# EAGLE board Conductivity (EAGLE 9.5.0)
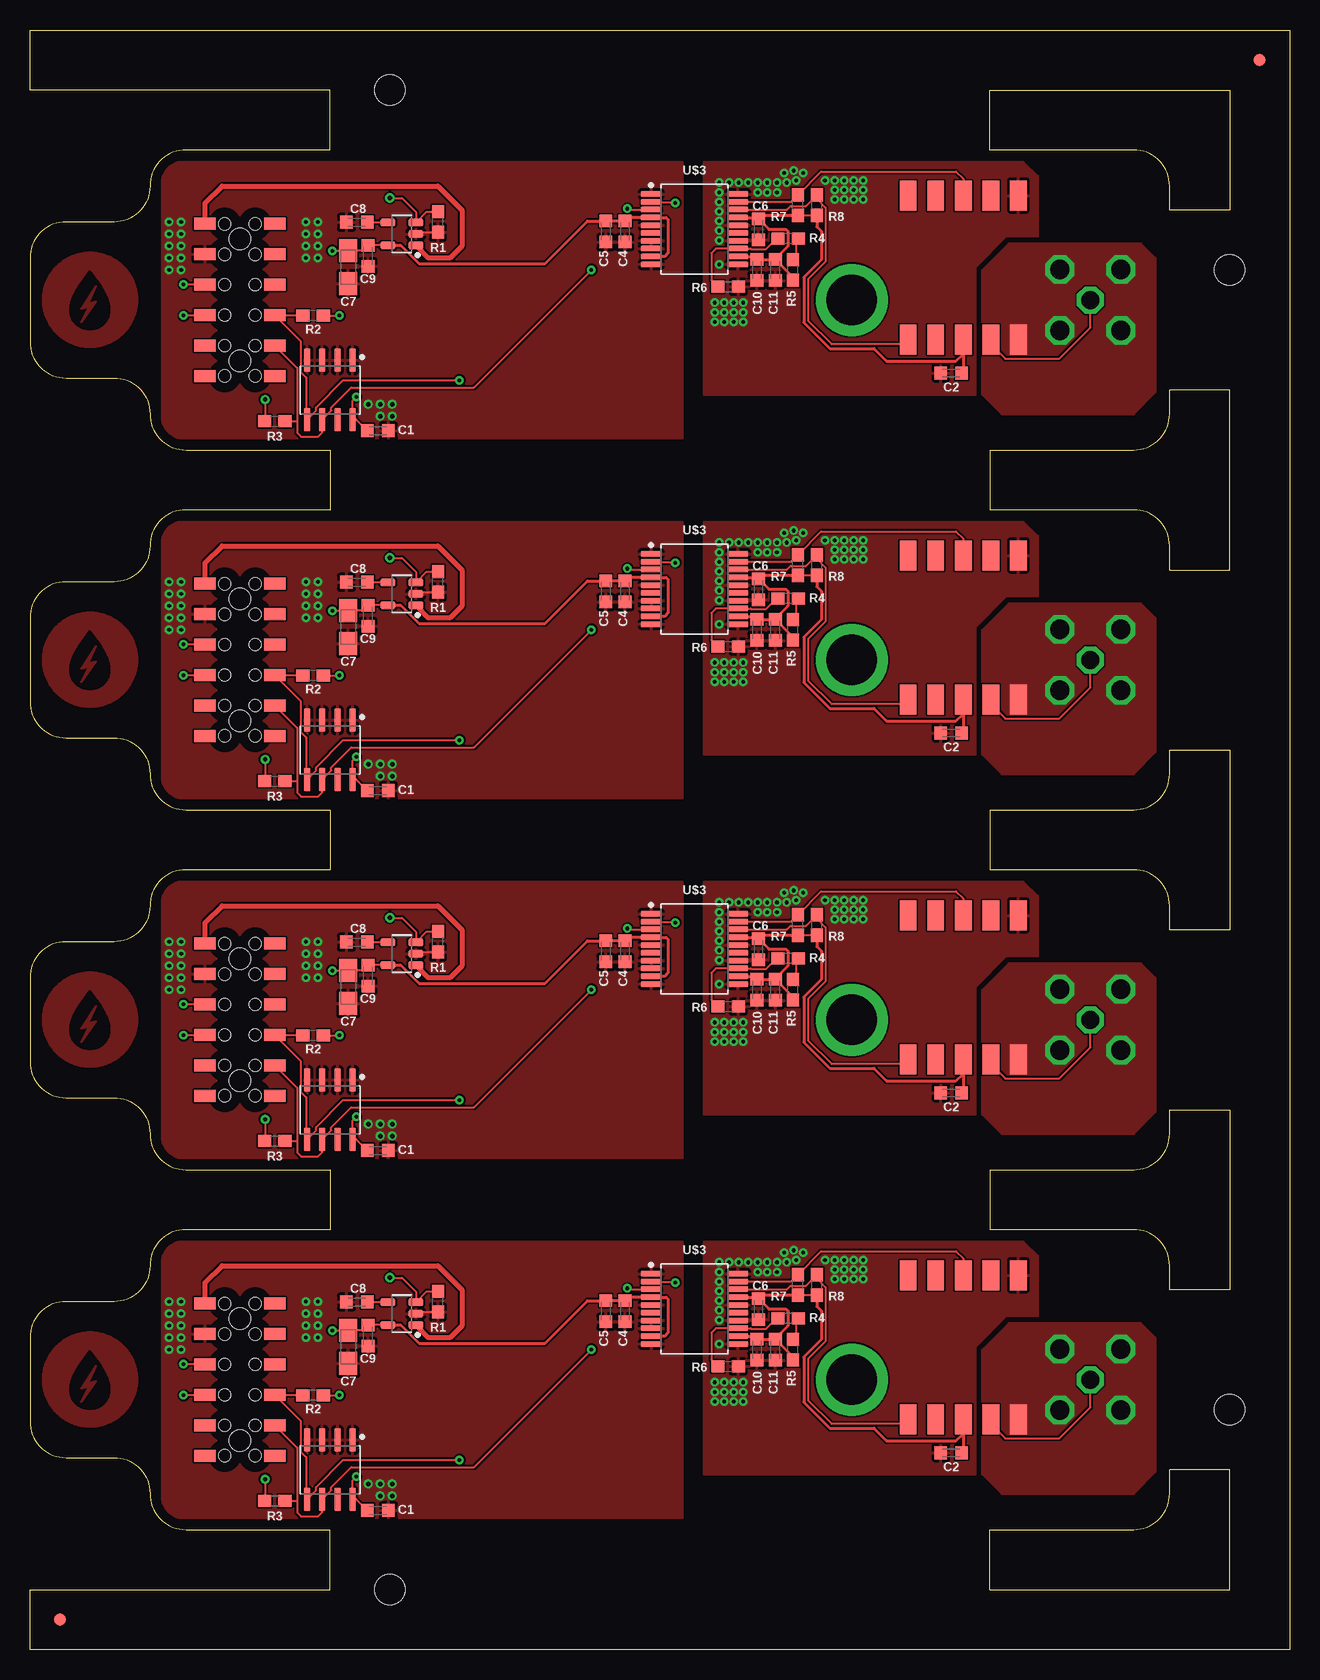
[diagram p0: board, top side]
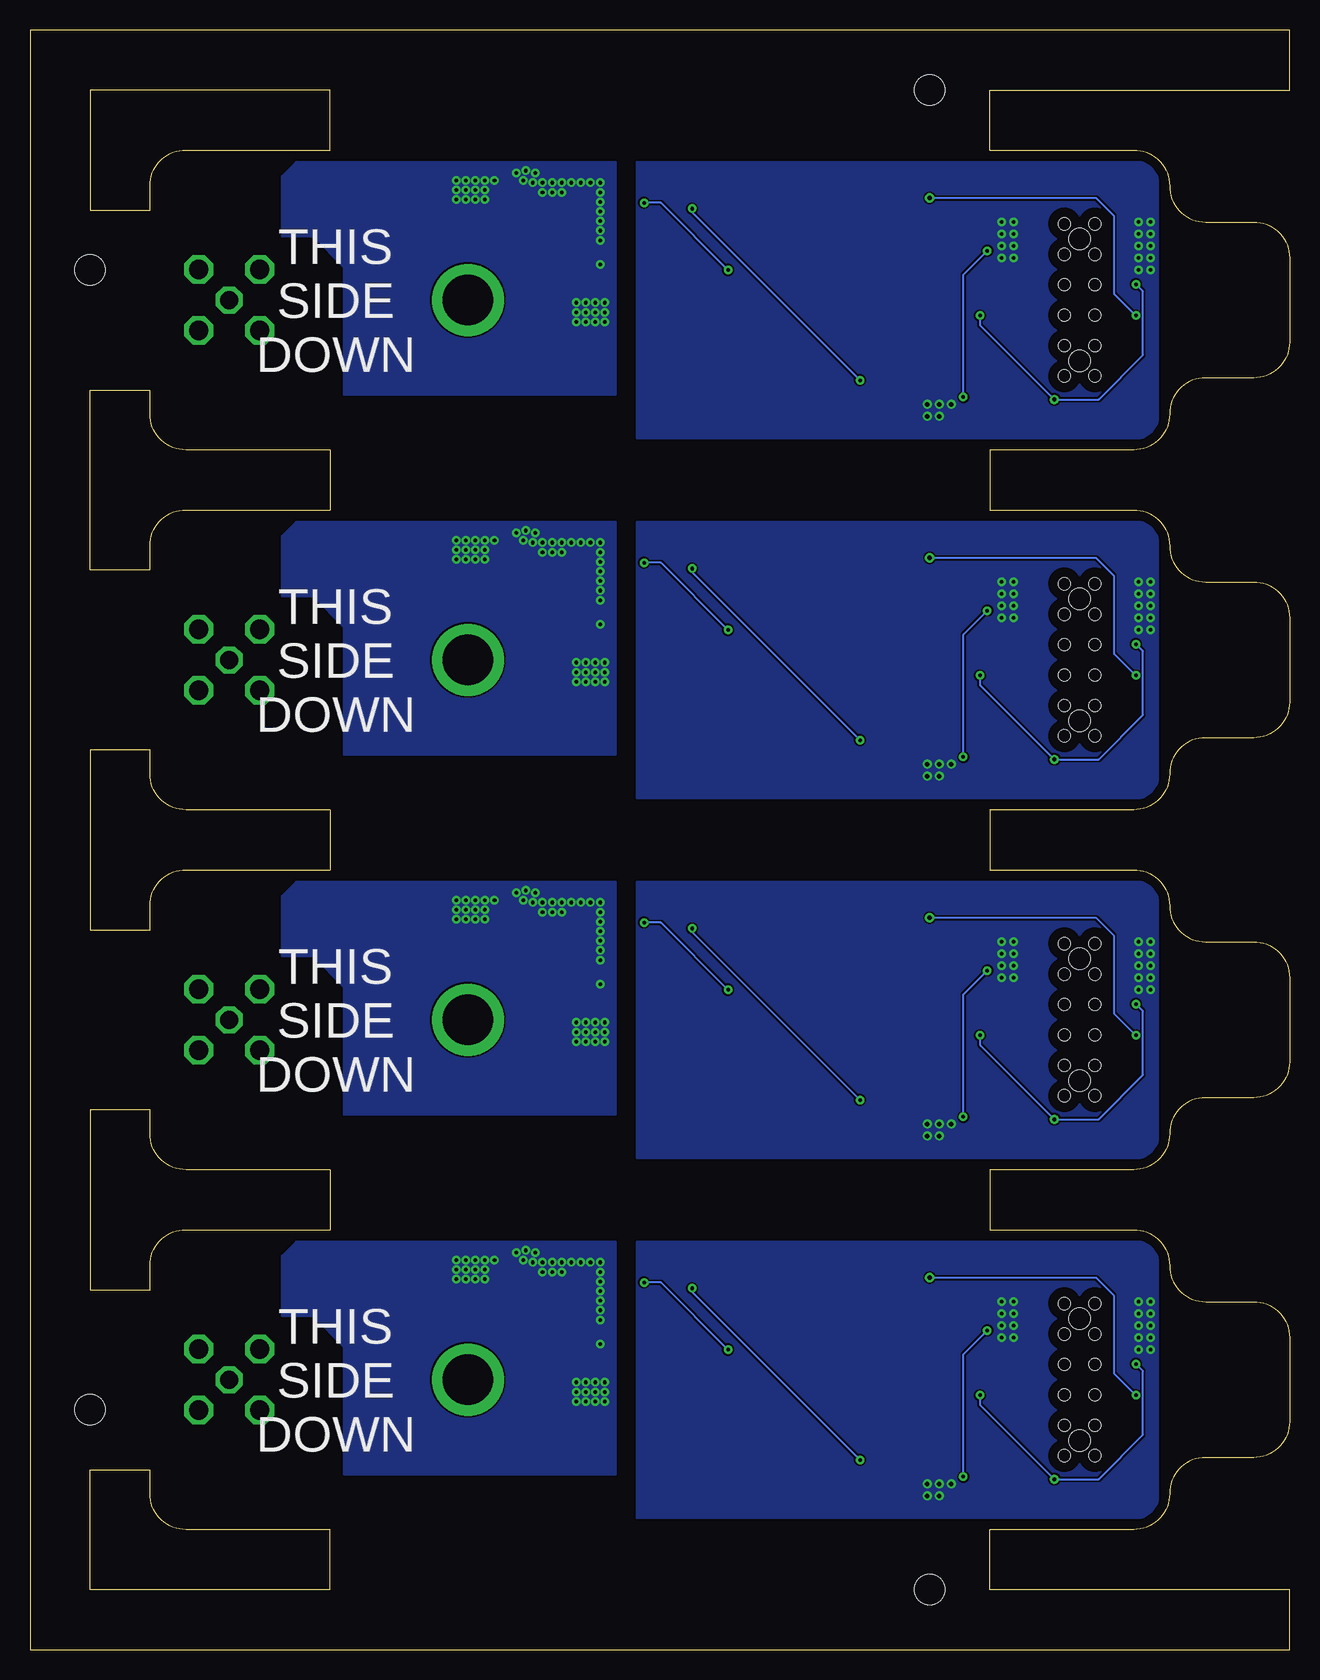
[diagram p1: board, bottom side, seen from below]

Size 105 x 135 mm. Coordinates in mm from the lower left corner, seen from the top.
Outline: 100 segments
Copper layers (1*16): Top 0.035mm / dielectric 1.5mm / Bottom 0.035mm
Design rules "default *": minimum track width 6mil, minimum drill 0.35mm, track to track 6mil, track to pad 6mil, pad to pad 6mil, via to via 6mil, smd to smd 6mil, copper to edge 32mil, drill to drill 6mil, minimum pad ring 10mil, minimum via ring 8mil, stop-mask expansion 4mil, vias tented up to drill 0.35mm, thermal gap 10mil
Holes 2.54 mm at 30,5 100,20 100,115 30,130

## Footprints (pad centres in the part's own frame; a part is rotated, then mirrored left to right if it is on the bottom)
C0603K = smd 1.05 x 1.08: 1 -0.875,0; 2 0.875,0
A/3216-18R = smd 1.95 x 1.5: + 1.375,0; - -1.375,0
FIDUCIAL_1MM = smd 1 x 1: 1 0,0
M20-7810645 = smd 1.02 x 1.78: P$1 -6.35,-2.91; P$2 -3.81,-2.91; P$3 -1.27,-2.91; P$4 1.27,-2.91; P$5 3.81,-2.91; P$6 6.35,-2.91; P$7 6.35,2.91; P$8 3.81,2.91; P$9 1.27,2.91; P$10 -1.27,2.91; P$11 -3.81,2.91; P$12 -6.35,2.91 | hole 1.02: -6.35,1.27; -3.81,1.27; -1.27,1.27; 1.27,1.27; 3.81,1.27; 6.35,1.27; 6.35,-1.27; 3.81,-1.27; 1.27,-1.27; -1.27,-1.27; -3.81,-1.27; -6.35,-1.27 | hole 1.8: -5.08,0; 5.08,0
0603 = smd 1.1 x 1: 1 -0.85,0; 2 0.85,0
SOIC127P600X175-8 = smd 1.968 x 0.569: 1 -2.473,1.905; 2 -2.473,0.635; 3 -2.473,-0.635; 4 -2.473,-1.905; 5 2.473,-1.905; 6 2.473,-0.635; 7 2.473,0.635; 8 2.473,1.905
5-1814832-1 = drill 1.6 octagon: G1 -2.54,2.54; G2 -2.54,-2.54; G3 2.54,-2.54; G4 2.54,2.54 | drill 1.5 octagon: PIN 0,0
ATLAS-10P = smd 2.5 x 1.4: PAD1 -6,5; PAD2 -6,2.7; PAD3 -6,0.4; PAD4 -6,-1.9; PAD5 -6,-4.2; PAD6 6,-4.2; PAD7 6,-1.9; PAD8 6,0.4; PAD9 6,2.7; PAD10 6,5
SOP65P780X200-20 = smd 1.702 x 0.475: 1 -3.603,2.925; 2 -3.603,2.275; 3 -3.603,1.625; 4 -3.603,0.975; 5 -3.603,0.325; 6 -3.603,-0.325; 7 -3.603,-0.975; 8 -3.603,-1.625; 9 -3.603,-2.275; 10 -3.603,-2.925; 11 3.603,-2.925; 12 3.603,-2.275; 13 3.603,-1.625; 14 3.603,-0.975; 15 3.603,-0.325; 16 3.603,0.325; 17 3.603,0.975; 18 3.603,1.625; 19 3.603,2.275; 20 3.603,2.925
SOT95P280X145-5 = smd 1.262 x 0.609: 1 -1.175,0.95; 2 -1.175,0; 3 -1.175,-0.95; 4 1.175,-0.95; 5 1.175,0.95

## Placement (x,y rotation side)
C1  .1uf  [C0603K]  29,101.6 0 top
C2  .1uf  [C0603K]  76.8,106.4 180 top
C3  6.8uf  [A/3216-18R]  26.54,85.23 90 top
C4  .1uf  [C0603K]  49.6,118.2 270 top
C5  10uf  [C0603K]  48,118.2 270 top
C6  .1uf  [C0603K]  60.73,118.38 270 top
C7  6.8uf  [A/3216-18R]  26.54,115.23 90 top
C8  [C0603K]  27.25,118.97 180 top
C9  .1uf  [C0603K]  28.17,116.17 270 top
C10  .1uf  [C0603K]  60.6,115 270 top
C11  10uf  [C0603K]  62.13,115 270 top
C12  [C0603K]  27.25,88.97 180 top
C13  .1uf  [C0603K]  28.17,86.17 270 top
C14  .1uf  [C0603K]  29,71.6 0 top
C15  .1uf  [C0603K]  76.8,76.4 180 top
C16  .1uf  [C0603K]  49.6,88.2 270 top
C17  10uf  [C0603K]  48,88.2 270 top
C18  .1uf  [C0603K]  60.73,88.38 270 top
C19  .1uf  [C0603K]  60.6,85 270 top
C20  10uf  [C0603K]  62.13,85 270 top
C21  6.8uf  [A/3216-18R]  26.54,55.23 90 top
C22  [C0603K]  27.25,58.97 180 top
C23  .1uf  [C0603K]  28.17,56.17 270 top
C24  .1uf  [C0603K]  29,41.6 0 top
C25  .1uf  [C0603K]  76.8,46.4 180 top
C26  .1uf  [C0603K]  49.6,58.2 270 top
C27  10uf  [C0603K]  48,58.2 270 top
C28  .1uf  [C0603K]  60.73,58.38 270 top
C29  .1uf  [C0603K]  60.6,55 270 top
C30  10uf  [C0603K]  62.13,55 270 top
C31  6.8uf  [A/3216-18R]  26.54,25.23 90 top
C32  [C0603K]  27.25,28.97 180 top
C33  .1uf  [C0603K]  28.17,26.18 270 top
C34  .1uf  [C0603K]  29,11.6 0 top
C35  .1uf  [C0603K]  76.8,16.4 180 top
C36  .1uf  [C0603K]  49.6,28.2 270 top
C37  10uf  [C0603K]  48,28.2 270 top
C38  .1uf  [C0603K]  60.73,28.38 270 top
C39  .1uf  [C0603K]  60.6,25 270 top
C40  10uf  [C0603K]  62.13,25 270 top
FID1  FIDUCIAL_1MM  [FIDUCIAL_1MM]  102.5,132.5 0 top
FID13  FIDUCIAL_1MM  [FIDUCIAL_1MM]  2.5,2.5 0 top
J1  2X6-HEADERS  [M20-7810645]  17.5,112.5 90 top
J2  2X6-HEADERS  [M20-7810645]  17.5,82.5 90 top
J3  2X6-HEADERS  [M20-7810645]  17.5,52.5 90 top
J4  2X6-HEADERS  [M20-7810645]  17.5,22.5 90 top
R1  100k  [0603]  34,119 90 top
R2  4.7k  [0603]  23.6,111.2 180 top
R3  4.7k  [0603]  20.4,102.4 0 top
R4  1.5k  [0603]  63.2,117.6 180 top
R5  1.5k  [0603]  63.6,115 90 top
R6  1.5k  [0603]  58.2,113.6 0 top
R7  4.7k  [0603]  64,120.4 90 top
R8  4.7k  [0603]  65.6,120.4 90 top
R9  100k  [0603]  34,89 90 top
R10  4.7k  [0603]  23.6,81.2 180 top
R11  4.7k  [0603]  20.4,72.4 0 top
R12  1.5k  [0603]  63.2,87.6 180 top
R13  1.5k  [0603]  63.6,85 90 top
R14  1.5k  [0603]  58.2,83.6 0 top
R15  4.7k  [0603]  64,90.4 90 top
R16  4.7k  [0603]  65.6,90.4 90 top
R17  100k  [0603]  34,59 90 top
R18  4.7k  [0603]  23.6,51.2 180 top
R19  4.7k  [0603]  20.4,42.4 0 top
R20  1.5k  [0603]  63.2,57.6 180 top
R21  1.5k  [0603]  63.6,55 90 top
R22  1.5k  [0603]  58.2,53.6 0 top
R23  4.7k  [0603]  64,60.4 90 top
R24  4.7k  [0603]  65.6,60.4 90 top
R25  100k  [0603]  34,29 90 top
R26  4.7k  [0603]  23.6,21.2 180 top
R27  4.7k  [0603]  20.4,12.4 0 top
R28  1.5k  [0603]  63.2,27.6 180 top
R29  1.5k  [0603]  63.6,25 90 top
R30  1.5k  [0603]  58.2,23.6 0 top
R31  4.7k  [0603]  64,30.4 90 top
R32  4.7k  [0603]  65.6,30.4 90 top
U1  M24C02-WMN6TP  [SOIC127P600X175-8]  25,75 270 top
U2  M24C02-WMN6TP  [SOIC127P600X175-8]  25,45 270 top
U3  M24C02-WMN6TP  [SOIC127P600X175-8]  25,105 270 top
U4  M24C02-WMN6TP  [SOIC127P600X175-8]  25,15 270 top
U$1  5-1814832-1  [5-1814832-1]  88.4,112.5 0 top
U$2  ATLAS10P  [ATLAS-10P]  78.2,115.2 90 top
U$3  ADM3260  [SOP65P780X200-20]  55.4,118.4 0 top
U$4  MIC5219-3.3YM5-TR  [SOT95P280X145-5]  31,118 180 top
U$5  MIC5219-3.3YM5-TR  [SOT95P280X145-5]  31,88 180 top
U$6  5-1814832-1  [5-1814832-1]  88.4,82.5 0 top
U$7  ATLAS10P  [ATLAS-10P]  78.2,85.2 90 top
U$8  ADM3260  [SOP65P780X200-20]  55.4,88.4 0 top
U$9  MIC5219-3.3YM5-TR  [SOT95P280X145-5]  31,58 180 top
U$10  5-1814832-1  [5-1814832-1]  88.4,52.5 0 top
U$11  ATLAS10P  [ATLAS-10P]  78.2,55.2 90 top
U$12  ADM3260  [SOP65P780X200-20]  55.4,58.4 0 top
U$13  MIC5219-3.3YM5-TR  [SOT95P280X145-5]  31,28 180 top
U$14  5-1814832-1  [5-1814832-1]  88.4,22.5 0 top
U$15  ATLAS10P  [ATLAS-10P]  78.2,25.2 90 top
U$16  ADM3260  [SOP65P780X200-20]  55.4,28.4 0 top

## Library data of the parts
C1-C40 = rcl; SPICEPREFIX: C
FID1 FID13 = microbuilder; BOM: EXCLUDE
J1-J4 U1-U4 U$1-U$16 = Conservify
R1-R32 = SparkFun-Resistors; PROD_ID: RES-07828

## Nets
3V1: C3.+ C13.1 C14.1 C16.1 C17.1 U1.8 U$5.5 U$8.4 U$8.9
3V2: C21.+ C23.1 C24.1 C26.1 C27.1 U2.8 U$9.5 U$12.4 U$12.9
3V3: C1.1 C4.1 C5.1 C7.+ C9.1 U3.8 U$3.4 U$3.9 U$4.5
3V4: C31.+ C33.1 C34.1 C36.1 C37.1 U4.8 U$13.5 U$16.4 U$16.9
ENABLE: J1.P$10 R1.2 U$4.3
ENABLE1: J2.P$10 R9.2 U$5.3
ENABLE2: J3.P$10 R17.2 U$9.3
ENABLE3: J4.P$10 R25.2 U$13.3
G1: J1.P$11
G2: J1.P$12
G3: J2.P$11
G4: J2.P$12
G5: J3.P$11
G6: J3.P$12
G7: J4.P$11
G8: J4.P$12
GND: C1.2 C4.2 C5.2 C7.- C8.2 C9.2 J1.P$8 R1.1 U3.1 U3.2 U3.3 U3.4 U$3.1 U$3.5 U$3.7 U$3.8 U$3.10 U$4.2
GND2: C3.- C12.2 C13.2 C14.2 C16.2 C17.2 J2.P$8 R9.1 U1.1 U1.2 U1.3 U1.4 U$5.2 U$8.1 U$8.5 U$8.7 U$8.8 U$8.10
GND4: C21.- C22.2 C23.2 C24.2 C26.2 C27.2 J3.P$8 R17.1 U2.1 U2.2 U2.3 U2.4 U$9.2 U$12.1 U$12.5 U$12.7 U$12.8 U$12.10
GND6: C31.- C32.2 C33.2 C34.2 C36.2 C37.2 J4.P$8 R25.1 U4.1 U4.2 U4.3 U4.4 U$13.2 U$16.1 U$16.5 U$16.7 U$16.8 U$16.10
I3V1: C15.1 C18.1 C19.1 C20.1 R13.1 R15.1 R16.1 U$7.PAD3 U$8.12 U$8.17
I3V2: C25.1 C28.1 C29.1 C30.1 R21.1 R23.1 R24.1 U$11.PAD3 U$12.12 U$12.17
I3V3: C2.1 C6.1 C10.1 C11.1 R5.1 R7.1 R8.1 U$2.PAD3 U$3.12 U$3.17
I3V4: C35.1 C38.1 C39.1 C40.1 R29.1 R31.1 R32.1 U$15.PAD3 U$16.12 U$16.17
IGND: C2.2 C6.2 C10.2 C11.2 R6.2 U$2.PAD6 U$3.11 U$3.14 U$3.16 U$3.20
IGND1: C15.2 C18.2 C19.2 C20.2 R14.2 U$7.PAD6 U$8.11 U$8.14 U$8.16 U$8.20
IGND2: C25.2 C28.2 C29.2 C30.2 R22.2 U$11.PAD6 U$12.11 U$12.14 U$12.16 U$12.20
IGND3: C35.2 C38.2 C39.2 C40.2 R30.2 U$15.PAD6 U$16.11 U$16.14 U$16.16 U$16.20
IN3V1: J2.P$9 R10.1 R11.1
IN3V2: J3.P$9 R18.1 R19.1
IN3V3: J1.P$9 R2.1 R3.1
IN3V4: J4.P$9 R26.1 R27.1
ISCL: R7.2 U$2.PAD8 U$3.19
ISCL1: R15.2 U$7.PAD8 U$8.19
ISCL2: R23.2 U$11.PAD8 U$12.19
ISCL3: R31.2 U$15.PAD8 U$16.19
ISDA: R8.2 U$2.PAD1 U$3.18
ISDA1: R16.2 U$7.PAD1 U$8.18
ISDA2: R24.2 U$11.PAD1 U$12.18
ISDA3: R32.2 U$15.PAD1 U$16.18
MISO: J1.P$4
MISO1: J2.P$4
MISO2: J3.P$4
MISO3: J4.P$4
MOSI: J1.P$5
MOSI1: J2.P$5
MOSI2: J3.P$5
MOSI3: J4.P$5
N$2: U$1.PIN U$2.PAD4
N$3: R4.1 R5.2
N$5: C12.1 U$5.4
N$6: C8.1 U$4.4
N$7: U$6.PIN U$7.PAD4
N$8: R12.1 R13.2
N$10: C22.1 U$9.4
N$11: U$10.PIN U$11.PAD4
N$12: R20.1 R21.2
N$14: C32.1 U$13.4
N$15: U$14.PIN U$15.PAD4
N$16: R28.1 R29.2
NC: J1.P$1
NC1: J2.P$1
NC2: J3.P$1
NC3: J4.P$1
PG: U$1.G1 U$1.G2 U$1.G3 U$1.G4 U$2.PAD5
PG1: U$6.G1 U$6.G2 U$6.G3 U$6.G4 U$7.PAD5
PG2: U$10.G1 U$10.G2 U$10.G3 U$10.G4 U$11.PAD5
PG3: U$14.G1 U$14.G2 U$14.G3 U$14.G4 U$15.PAD5
SCK: J1.P$6
SCK1: J2.P$6
SCK2: J3.P$6
SCK3: J4.P$6
SCL: J1.P$2 R3.2 U3.6 U$3.2
SCL1: J2.P$2 R11.2 U1.6 U$8.2
SCL2: J3.P$2 R19.2 U2.6 U$12.2
SCL3: J4.P$2 R27.2 U4.6 U$16.2
SDA: J1.P$3 R2.2 U3.5 U$3.3
SDA1: J2.P$3 R10.2 U1.5 U$8.3
SDA2: J3.P$3 R18.2 U2.5 U$12.3
SDA3: J4.P$3 R26.2 U4.5 U$16.3
UNREG: J1.P$7 U$4.1
UNREG1: J2.P$7 U$5.1
UNREG2: J3.P$7 U$9.1
UNREG3: J4.P$7 U$13.1
VSEL: R4.2 R6.1 U$3.13
VSEL1: R12.2 R14.1 U$8.13
VSEL2: R20.2 R22.1 U$12.13
VSEL3: R28.2 R30.1 U$16.13
WC: U3.7
WC1: U1.7
WC2: U2.7
WC3: U4.7

## Tracks (layer width: path | path; a pad name or v marks a point on that pad's centre or on a via)
3V1  (via drill 0.3)
  Top 0.152: 29.95,87.05 U$5.5 C13.1 27.73,86.61 C3.+ v25.21,86.61 v25.2,86.6 | C14.1 27.2,72.53 | 27.2,72.53 27,72.73 | 27.2,72.53 U1.8 26.91,74.11 v27.2,74.4
  Top 0.254: U$8.9 52.92,86.12 53.2,86.4 53.2,89.2 53.02,89.38 U$8.4 49.9,89.38 C16.1 C17.1 46.48,89.08 42.92,85.52 32.45,85.52 30.92,87.05 U$5.5
  Bottom 0.152: v27.2,74.4 27.2,84.6 v25.2,86.6
3V2  (via drill 0.3)
  Top 0.152: 29.95,57.05 U$9.5 C23.1 27.73,56.61 C21.+ v25.21,56.61 v25.2,56.6 | C24.1 27.2,42.53 | 27.2,42.53 27,42.73 | 27.2,42.53 U2.8 26.91,44.1 v27.2,44.4
  Top 0.254: U$12.9 52.92,56.12 53.2,56.4 53.2,59.2 53.02,59.38 U$12.4 49.9,59.38 C26.1 C27.1 46.48,59.08 42.92,55.52 32.45,55.52 30.92,57.05 U$9.5
  Bottom 0.152: v27.2,44.4 27.2,54.6 v25.2,56.6
3V3  (via drill 0.3)
  Top 0.152: 29.95,117.05 U$4.5 C9.1 27.73,116.61 C7.+ v25.21,116.61 v25.2,116.6 | C1.1 27.2,102.53 | 27.2,102.53 27,102.73 | 27.2,102.53 U3.8 26.91,104.11 v27.2,104.4
  Top 0.254: U$3.9 52.92,116.12 53.2,116.4 53.2,119.2 53.02,119.38 U$3.4 49.9,119.38 C4.1 C5.1 46.48,119.08 42.92,115.52 32.45,115.52 30.92,117.05 U$4.5
  Bottom 0.152: v27.2,104.4 27.2,114.6 v25.2,116.6
3V4  (via drill 0.3)
  Top 0.152: 29.95,27.05 U$13.5 C33.1 27.73,26.61 C31.+ v25.21,26.61 v25.2,26.6 | C34.1 27.2,12.53 | 27.2,12.53 27,12.73 | 27.2,12.53 U4.8 26.91,14.11 v27.2,14.4
  Top 0.254: U$16.9 52.92,26.12 53.2,26.4 53.2,29.2 53.02,29.38 U$16.4 49.9,29.38 C36.1 C37.1 46.48,29.07 42.92,25.52 32.45,25.52 30.92,27.05 U$13.5
  Bottom 0.152: v27.2,14.4 27.2,24.6 v25.2,26.6
ENABLE  (via drill 0.3, 0.35)
  Top 0.152: R1.2 33.08,119.85 U$4.3 32.17,119.83 31,121 v30,121 | v12.8,111.2 12.83,111.23 J1.P$10
  Bottom 0.152: v30,121 16.11,121 14.63,119.51 14.63,113.03 v12.8,111.2
ENABLE1  (via drill 0.3, 0.35)
  Top 0.152: R9.2 33.08,89.85 U$5.3 32.17,89.83 31,91 v30,91 | v12.8,81.2 12.83,81.23 J2.P$10
  Bottom 0.152: v30,91 16.11,91 14.63,89.51 14.63,83.03 v12.8,81.2
ENABLE2  (via drill 0.3, 0.35)
  Top 0.152: R17.2 33.08,59.85 U$9.3 32.17,59.83 31,61 v30,61 | v12.8,51.2 12.83,51.23 J3.P$10
  Bottom 0.152: v30,61 16.11,61 14.63,59.51 14.63,53.03 v12.8,51.2
ENABLE3  (via drill 0.3, 0.35)
  Top 0.152: R25.2 33.08,29.85 U$13.3 32.17,29.82 31,31 v30,31 | v12.8,21.2 12.83,21.23 J4.P$10
  Bottom 0.152: v30,31 16.11,31 14.63,29.51 14.63,23.03 v12.8,21.2
GND  (via drill 0.3, 0.35)
  Top 0.152: U$4.2 32.33,118.15 R1.1
  other vias: 23,119 24,119 24,118 23,118 24,117 23,117 24,116 11.6,119 11.6,118 11.6,117 11.6,116 11.6,115 12.6,119 12.6,118 12.6,117 12.6,116 12.6,115 30.2,103.8 28.2,103.8 29.2,103.8 29.2,102.8 30.2,102.8 23,116
  pour Top: 11,124 54.4,124 54.4,101 11,101
  pour Bottom: 11,124 54.4,124 54.4,101 11,101
GND1
  pour Top (rank 3): 4.22,111.74 4.24,111.72 4.25,111.71 4.28,111.71 4.3,111.71 4.78,111.83 4.21,110.7 4.21,110.67 4.21,110.66 4.21,110.64 4.22,110.62 4.24,110.6 4.25,110.59 4.27,110.58 4.29,110.58 4.31,110.59 4.32,110.59 4.35,110.61 5.55,112.3 5.56,112.32 5.57,112.34 5.57,112.35 5.56,112.37 5.55,112.39 5.54,112.41 5.52,112.42 5.51,112.42 5.49,112.43 5.47,112.42 4.99,112.3 5.56,113.6 5.57,113.62 5.57,113.64 5.56,113.65 5.56,113.66 5.55,113.68 5.53,113.7 5.49,113.71 5.48,113.71 5.46,113.71 5.45,113.7 5.44,113.69 5.43,113.68 4.22,111.83 4.21,111.81 4.21,111.78 4.21,111.76
  pour Top (rank 3): 380 corners
GND2  (via drill 0.3, 0.35)
  Top 0.152: U$5.2 32.33,88.15 R9.1
  other vias: 23,89 24,89 24,88 23,88 24,87 23,87 24,86 11.6,89 11.6,88 11.6,87 11.6,86 11.6,85 12.6,89 12.6,88 12.6,87 12.6,86 12.6,85 30.2,73.8 28.2,73.8 29.2,73.8 29.2,72.8 30.2,72.8 23,86
  pour Top: 11,94 54.4,94 54.4,71 11,71
  pour Bottom: 11,94 54.4,94 54.4,71 11,71
GND3
  pour Top (rank 3): 4.22,81.74 4.24,81.72 4.25,81.71 4.28,81.71 4.3,81.71 4.78,81.83 4.21,80.7 4.21,80.67 4.21,80.66 4.21,80.64 4.22,80.62 4.24,80.6 4.25,80.59 4.27,80.58 4.29,80.58 4.31,80.59 4.32,80.59 4.35,80.61 5.55,82.3 5.56,82.32 5.57,82.34 5.57,82.35 5.56,82.37 5.55,82.39 5.54,82.41 5.52,82.42 5.51,82.42 5.49,82.43 5.47,82.42 4.99,82.3 5.56,83.6 5.57,83.62 5.57,83.64 5.56,83.65 5.56,83.66 5.55,83.68 5.53,83.7 5.49,83.71 5.48,83.71 5.46,83.71 5.45,83.7 5.44,83.69 5.43,83.68 4.22,81.83 4.21,81.81 4.21,81.78 4.21,81.76
  pour Top (rank 3): 380 corners
GND4  (via drill 0.3, 0.35)
  Top 0.152: U$9.2 32.33,58.15 R17.1
  other vias: 23,59 24,59 24,58 23,58 24,57 23,57 24,56 11.6,59 11.6,58 11.6,57 11.6,56 11.6,55 12.6,59 12.6,58 12.6,57 12.6,56 12.6,55 30.2,43.8 28.2,43.8 29.2,43.8 29.2,42.8 30.2,42.8 23,56
  pour Top: 11,64 54.4,64 54.4,41 11,41
  pour Bottom: 11,64 54.4,64 54.4,41 11,41
GND5
  pour Top (rank 3): 4.22,51.74 4.24,51.72 4.25,51.71 4.28,51.71 4.3,51.71 4.78,51.83 4.21,50.7 4.21,50.67 4.21,50.66 4.21,50.64 4.22,50.62 4.24,50.6 4.25,50.59 4.27,50.58 4.29,50.58 4.31,50.59 4.32,50.59 4.35,50.61 5.55,52.3 5.56,52.32 5.57,52.34 5.57,52.35 5.56,52.37 5.55,52.39 5.54,52.41 5.52,52.42 5.51,52.42 5.49,52.43 5.47,52.42 4.99,52.3 5.56,53.6 5.57,53.62 5.57,53.64 5.56,53.65 5.56,53.66 5.55,53.68 5.53,53.7 5.49,53.71 5.48,53.71 5.46,53.71 5.45,53.7 5.44,53.69 5.43,53.68 4.22,51.83 4.21,51.81 4.21,51.78 4.21,51.76
  pour Top (rank 3): 380 corners
GND6  (via drill 0.3, 0.35)
  Top 0.152: U$13.2 32.33,28.15 R25.1
  other vias: 23,29 24,29 24,28 23,28 24,27 23,27 24,26 11.6,29 11.6,28 11.6,27 11.6,26 11.6,25 12.6,29 12.6,28 12.6,27 12.6,26 12.6,25 30.2,13.8 28.2,13.8 29.2,13.8 29.2,12.8 30.2,12.8 23,26
  pour Top: 11,34 54.4,34 54.4,11 11,11
  pour Bottom: 11,34 54.4,34 54.4,11 11,11
GND7
  pour Top (rank 3): 4.22,21.74 4.24,21.72 4.25,21.71 4.28,21.71 4.3,21.71 4.78,21.83 4.21,20.7 4.21,20.67 4.21,20.66 4.21,20.64 4.22,20.62 4.24,20.6 4.25,20.59 4.27,20.58 4.29,20.58 4.31,20.59 4.32,20.59 4.35,20.61 5.55,22.3 5.56,22.32 5.57,22.34 5.57,22.35 5.56,22.37 5.55,22.39 5.54,22.41 5.52,22.42 5.51,22.42 5.49,22.43 5.47,22.42 4.99,22.3 5.56,23.6 5.57,23.62 5.57,23.64 5.56,23.65 5.56,23.66 5.55,23.68 5.53,23.7 5.49,23.71 5.48,23.71 5.46,23.71 5.45,23.7 5.44,23.69 5.43,23.68 4.22,21.83 4.21,21.81 4.21,21.78 4.21,21.76
  pour Top (rank 3): 380 corners
I3V1
  Top 0.152: 63.83,89.38 R15.1 R16.1
  Top 0.254: R16.1 65.6,88.6 65.97,88.23 65.97,85.84 64.52,84.39 64.52,80.61 66.69,78.44 70.36,78.44 71.4,77.4 77.2,77.4 77.8,78 U$7.PAD3 77.8,76.53 C15.1 | U$8.12 60.35,86.12 C19.1 C20.1 | C18.1 61.6,88.38 63.02,88.38 63.18,88.22 63.18,86.98 62.13,85.93 C20.1 | C20.1 63.6,84.4 R13.1 | U$8.17 60.61,89.38 C18.1 | C18.1 61.03,89.55 R15.1
I3V2
  Top 0.152: 63.83,59.38 R23.1 R24.1
  Top 0.254: R24.1 65.6,58.6 65.97,58.23 65.97,55.84 64.52,54.38 64.52,50.62 66.69,48.44 70.36,48.44 71.4,47.4 77.2,47.4 77.8,48 U$11.PAD3 77.8,46.52 C25.1 | U$12.12 60.35,56.12 C29.1 C30.1 | C28.1 61.6,58.38 63.02,58.38 63.18,58.22 63.18,56.98 62.13,55.93 C30.1 | C30.1 63.6,54.4 R21.1 | U$12.17 60.61,59.38 C28.1 | C28.1 61.03,59.55 R23.1
I3V3
  Top 0.152: 63.83,119.38 R7.1 R8.1
  Top 0.254: R8.1 65.6,118.6 65.97,118.23 65.97,115.84 64.52,114.39 64.52,110.61 66.69,108.44 70.36,108.44 71.4,107.4 77.2,107.4 77.8,108 U$2.PAD3 77.8,106.53 C2.1 | U$3.12 60.35,116.12 C10.1 C11.1 | C6.1 61.6,118.38 63.02,118.38 63.18,118.22 63.18,116.98 62.13,115.93 C11.1 | C11.1 63.6,114.4 R5.1 | U$3.17 60.61,119.38 C6.1 | C6.1 61.03,119.55 R7.1
I3V4
  Top 0.152: 63.83,29.38 R31.1 R32.1
  Top 0.254: R32.1 65.6,28.6 65.97,28.23 65.97,25.84 64.52,24.39 64.52,20.62 66.69,18.44 70.36,18.44 71.4,17.4 77.2,17.4 77.8,18 U$15.PAD3 77.8,16.52 C35.1 | U$16.12 60.35,26.12 C39.1 C40.1 | C38.1 61.6,28.38 63.02,28.38 63.18,28.22 63.18,26.98 62.13,25.93 C40.1 | C40.1 63.6,24.4 R29.1 | U$16.17 60.61,29.38 C38.1 | C38.1 61.03,29.55 R31.1
IGND  (via drill 0.3)
  other vias: 57.47,115.47 57.47,117.47 57.47,118.27 57.47,119.07 57.47,119.87 57.47,120.67 57.47,121.47 57.07,112.27 57.87,112.27 58.67,112.27 59.47,112.27 57.07,111.47 57.87,111.47 58.67,111.47 57.07,110.67 59.47,111.47 58.27,122.27 59.07,122.27 59.87,122.27 60.67,121.47 61.47,121.47 62.27,121.47 60.67,122.27 61.47,122.27 62.27,122.27 57.47,122.27 63.07,122.27 63.87,122.47 63.67,123.27 64.47,123.07 62.87,123.07 66.27,122.47 67.07,122.47 67.87,122.47 68.67,122.47 69.47,122.47 67.07,121.67 67.87,121.67 68.67,121.67 69.47,121.67 67.07,120.87 67.87,120.87 68.67,120.87 69.47,120.87 57.87,110.67 58.67,110.67 59.47,110.67
  pour Bottom: 56.2,104.6 56.2,124 82.8,124 84,122.8 84,117.8 81.4,117.8 78.8,115.2 78.8,104.6
  pour Top: 84,117.8 84,122.8 82.8,124 56.2,124 56.2,104.6 78.8,104.6 78.8,115.2 81.4,117.8
IGND1  (via drill 0.3)
  other vias: 57.47,85.47 57.47,87.47 57.47,88.27 57.47,89.07 57.47,89.87 57.47,90.67 57.47,91.47 57.07,82.27 57.87,82.27 58.67,82.27 59.47,82.27 57.07,81.47 57.87,81.47 58.67,81.47 57.07,80.67 59.47,81.47 58.27,92.27 59.07,92.27 59.87,92.27 60.67,91.47 61.47,91.47 62.27,91.47 60.67,92.27 61.47,92.27 62.27,92.27 57.47,92.27 63.07,92.27 63.87,92.47 63.67,93.27 64.47,93.07 62.87,93.07 66.27,92.47 67.07,92.47 67.87,92.47 68.67,92.47 69.47,92.47 67.07,91.67 67.87,91.67 68.67,91.67 69.47,91.67 67.07,90.87 67.87,90.87 68.67,90.87 69.47,90.87 57.87,80.67 58.67,80.67 59.47,80.67
  pour Bottom: 56.2,74.6 56.2,94 82.8,94 84,92.8 84,87.8 81.4,87.8 78.8,85.2 78.8,74.6
  pour Top: 84,87.8 84,92.8 82.8,94 56.2,94 56.2,74.6 78.8,74.6 78.8,85.2 81.4,87.8
IGND2  (via drill 0.3)
  other vias: 57.47,55.47 57.47,57.47 57.47,58.27 57.47,59.07 57.47,59.87 57.47,60.67 57.47,61.47 57.07,52.27 57.87,52.27 58.67,52.27 59.47,52.27 57.07,51.47 57.87,51.47 58.67,51.47 57.07,50.67 59.47,51.47 58.27,62.27 59.07,62.27 59.87,62.27 60.67,61.47 61.47,61.47 62.27,61.47 60.67,62.27 61.47,62.27 62.27,62.27 57.47,62.27 63.07,62.27 63.87,62.47 63.67,63.27 64.47,63.07 62.87,63.07 66.27,62.47 67.07,62.47 67.87,62.47 68.67,62.47 69.47,62.47 67.07,61.67 67.87,61.67 68.67,61.67 69.47,61.67 67.07,60.87 67.87,60.87 68.67,60.87 69.47,60.87 57.87,50.67 58.67,50.67 59.47,50.67
  pour Bottom: 56.2,44.6 56.2,64 82.8,64 84,62.8 84,57.8 81.4,57.8 78.8,55.2 78.8,44.6
  pour Top: 84,57.8 84,62.8 82.8,64 56.2,64 56.2,44.6 78.8,44.6 78.8,55.2 81.4,57.8
IGND3  (via drill 0.3)
  other vias: 57.47,25.47 57.47,27.47 57.47,28.27 57.47,29.07 57.47,29.87 57.47,30.67 57.47,31.47 57.07,22.27 57.87,22.27 58.67,22.27 59.47,22.27 57.07,21.47 57.87,21.47 58.67,21.47 57.07,20.67 59.47,21.47 58.27,32.27 59.07,32.27 59.87,32.27 60.67,31.47 61.47,31.47 62.27,31.47 60.67,32.27 61.47,32.27 62.27,32.27 57.47,32.27 63.07,32.27 63.87,32.47 63.67,33.27 64.47,33.07 62.87,33.07 66.27,32.47 67.07,32.47 67.87,32.47 68.67,32.47 69.47,32.47 67.07,31.67 67.87,31.67 68.67,31.67 69.47,31.67 67.07,30.87 67.87,30.87 68.67,30.87 69.47,30.87 57.87,20.67 58.67,20.67 59.47,20.67
  pour Bottom: 56.2,14.6 56.2,34 82.8,34 84,32.8 84,27.8 81.4,27.8 78.8,25.2 78.8,14.6
  pour Top: 84,27.8 84,32.8 82.8,34 56.2,34 56.2,14.6 78.8,14.6 78.8,25.2 81.4,27.8
IN3V1  (via drill 0.3, 0.35)
  Top 0.152: v19.6,74.2 19.6,72.45 R11.1 | R10.1 v25.8,81.2 | v12.8,83.8 14.56,83.8 J2.P$9
  Bottom 0.152: v25.8,81.2 25.8,80.4 v19.6,74.2 15.91,74.2 12.22,77.9 12.22,83.22 v12.8,83.8
IN3V2  (via drill 0.3, 0.35)
  Top 0.152: v19.6,44.2 19.6,42.45 R19.1 | R18.1 v25.8,51.2 | v12.8,53.8 14.56,53.8 J3.P$9
  Bottom 0.152: v25.8,51.2 25.8,50.4 v19.6,44.2 15.91,44.2 12.22,47.9 12.22,53.22 v12.8,53.8
IN3V3  (via drill 0.3, 0.35)
  Top 0.152: v19.6,104.2 19.6,102.45 R3.1 | R2.1 v25.8,111.2 | v12.8,113.8 14.56,113.8 J1.P$9
  Bottom 0.152: v25.8,111.2 25.8,110.4 v19.6,104.2 15.91,104.2 12.22,107.9 12.22,113.22 v12.8,113.8
IN3V4  (via drill 0.3, 0.35)
  Top 0.152: v19.6,14.2 19.6,12.45 R27.1 | R26.1 v25.8,21.2 | v12.8,23.8 14.56,23.8 J4.P$9
  Bottom 0.152: v25.8,21.2 25.8,20.4 v19.6,14.2 15.91,14.2 12.22,17.9 12.22,23.22 v12.8,23.8
ISCL
  Top 0.152: U$3.19 63.42,120.67 R7.2 65.95,123.2 77.2,123.2 77.8,122.6 U$2.PAD8
ISCL1
  Top 0.152: U$8.19 63.42,90.67 R15.2 65.95,93.2 77.2,93.2 77.8,92.6 U$7.PAD8
ISCL2
  Top 0.152: U$12.19 63.42,60.67 R23.2 65.95,63.2 77.2,63.2 77.8,62.6 U$11.PAD8
ISCL3
  Top 0.152: U$16.19 63.42,30.68 R31.2 65.95,33.2 77.2,33.2 77.8,32.6 U$15.PAD8
ISDA
  Top 0.152: U$3.18 63.1,120.03 63.41,120.33 64.68,120.33 R8.2 65.6,120.92 66.33,120.19 66.33,115.69 64.87,114.24 64.87,110.76 66.83,108.8 72.8,108.8 U$2.PAD1
ISDA1
  Top 0.152: U$8.18 63.1,90.03 63.41,90.33 64.68,90.33 R16.2 65.6,90.92 66.33,90.19 66.33,85.69 64.87,84.24 64.87,80.76 66.83,78.8 72.8,78.8 U$7.PAD1
ISDA2
  Top 0.152: U$12.18 63.1,60.02 63.41,60.33 64.68,60.33 R24.2 65.6,60.92 66.33,60.2 66.33,55.7 64.87,54.24 64.87,50.76 66.83,48.8 72.8,48.8 U$11.PAD1
ISDA3
  Top 0.152: U$16.18 63.1,30.02 63.41,30.33 64.68,30.33 R32.2 65.6,30.92 66.33,30.2 66.33,25.7 64.87,24.24 64.87,20.76 66.83,18.8 72.8,18.8 U$15.PAD1
N$1  (via drill 4.2 pad 6)
  other vias: 68.5,112.5
N$2
  Top 0.152: U$2.PAD4 80.1,108.8 81.3,107.6 85.8,107.6 88.4,110.2 U$1.PIN
N$3
  Top 0.152: R4.1 63.85,117.4 63.85,116.1 R5.2
N$4  (via drill 4.2 pad 6)
  other vias: 68.5,82.5
N$5
  Top 0.152: C12.1 29.81,88.97 U$5.4
N$6
  Top 0.152: C8.1 29.81,118.97 U$4.4
N$7
  Top 0.152: U$7.PAD4 80.1,78.8 81.3,77.6 85.8,77.6 88.4,80.2 U$6.PIN
N$8
  Top 0.152: R12.1 63.85,87.4 63.85,86.1 R13.2
N$9  (via drill 4.2 pad 6)
  other vias: 68.5,52.5
N$10
  Top 0.152: C22.1 29.81,58.97 U$9.4
N$11
  Top 0.152: U$11.PAD4 80.1,48.8 81.3,47.6 85.8,47.6 88.4,50.2 U$10.PIN
N$12
  Top 0.152: R20.1 63.85,57.4 63.85,56.1 R21.2
N$13  (via drill 4.2 pad 6)
  other vias: 68.5,22.5
N$14
  Top 0.152: C32.1 29.81,28.97 U$13.4
N$15
  Top 0.152: U$15.PAD4 80.1,18.8 81.3,17.6 85.8,17.6 88.4,20.2 U$14.PIN
N$16
  Top 0.152: R28.1 63.85,27.4 63.85,26.1 R29.2
PG
  pour Top (no thermals): 79.4,104.6 79.4,115 81.6,117.2 92.6,117.2 93.8,116 93.8,104.8 92,103 81,103
PG1
  pour Top (no thermals): 79.4,74.6 79.4,85 81.6,87.2 92.6,87.2 93.8,86 93.8,74.8 92,73 81,73
PG2
  pour Top (no thermals): 79.4,44.6 79.4,55 81.6,57.2 92.6,57.2 93.8,56 93.8,44.8 92,43 81,43
PG3
  pour Top (no thermals): 79.4,14.6 79.4,25 81.6,27.2 92.6,27.2 93.8,26 93.8,14.8 92,13 81,13
SCL  (via drill 0.3)
  Top 0.152: J1.P$2 22.28,106.82 22.28,102.42 | 22.28,102.42 22.28,101.42 22.6,101.1 22.6,101.09 24,101.09 24.36,101.46 U3.6 25.12,103.28 25.12,103.54 26.78,105.2 37,105.2 v46.8,115 | R3.2 22.26,102.4 22.28,102.42 | v53.8,120.6 51.87,120.6 U$3.2
  Bottom 0.152: v46.8,115 52.4,120.6 v53.8,120.6
SCL1  (via drill 0.3)
  Top 0.152: J2.P$2 22.28,76.82 22.28,72.42 | 22.28,72.42 22.28,71.42 22.6,71.1 22.6,71.09 24,71.09 24.36,71.46 U1.6 25.12,73.28 25.12,73.54 26.78,75.2 37,75.2 v46.8,85 | R11.2 22.26,72.4 22.28,72.42 | v53.8,90.6 51.87,90.6 U$8.2
  Bottom 0.152: v46.8,85 52.4,90.6 v53.8,90.6
SCL2  (via drill 0.3)
  Top 0.152: J3.P$2 22.28,46.82 22.28,42.42 | 22.28,42.42 22.28,41.42 22.6,41.1 22.6,41.09 24,41.09 24.36,41.46 U2.6 25.12,43.28 25.12,43.54 26.78,45.2 37,45.2 v46.8,55 | R19.2 22.26,42.4 22.28,42.42 | v53.8,60.6 51.87,60.6 U$12.2
  Bottom 0.152: v46.8,55 52.4,60.6 v53.8,60.6
SCL3  (via drill 0.3)
  Top 0.152: J4.P$2 22.28,16.82 22.28,12.42 | 22.28,12.42 22.28,11.42 22.6,11.1 22.6,11.09 24,11.09 24.36,11.46 U4.6 25.12,13.28 25.12,13.54 26.78,15.2 37,15.2 v46.8,25 | R27.2 22.26,12.4 22.28,12.42 | v53.8,30.6 51.87,30.6 U$16.2
  Bottom 0.152: v46.8,25 52.4,30.6 v53.8,30.6
SDA  (via drill 0.3)
  Top 0.152: R2.2 22.72,111.23 J1.P$3 22.58,109.06 22.58,106.46 23.02,106.02 23.02,102.6 U3.5 23.85,103.28 23.85,103.54 26.11,105.8 v35.8,105.8 | v49.8,120.11 49.88,120.03 U$3.3
  Bottom 0.152: v35.8,105.8 49.8,119.8 v49.8,120.11
SDA1  (via drill 0.3)
  Top 0.152: R10.2 22.72,81.23 J2.P$3 22.58,79.06 22.58,76.46 23.02,76.02 23.02,72.6 U1.5 23.85,73.28 23.85,73.54 26.11,75.8 v35.8,75.8 | v49.8,90.11 49.88,90.03 U$8.3
  Bottom 0.152: v35.8,75.8 49.8,89.8 v49.8,90.11
SDA2  (via drill 0.3)
  Top 0.152: R18.2 22.72,51.23 J3.P$3 22.58,49.06 22.58,46.46 23.02,46.02 23.02,42.6 U2.5 23.85,43.28 23.85,43.54 26.11,45.8 v35.8,45.8 | v49.8,60.11 49.88,60.02 U$12.3
  Bottom 0.152: v35.8,45.8 49.8,59.8 v49.8,60.11
SDA3  (via drill 0.3)
  Top 0.152: R26.2 22.72,21.23 J4.P$3 22.58,19.06 22.58,16.46 23.02,16.02 23.02,12.6 U4.5 23.85,13.28 23.85,13.54 26.11,15.8 v35.8,15.8 | v49.8,30.11 49.88,30.02 U$16.3
  Bottom 0.152: v35.8,15.8 49.8,29.8 v49.8,30.11
UNREG
  Top 0.406: J1.P$7 14.59,120.59 16,122 34,122 36,120 36,117 35,116 33.23,116 U$4.1
UNREG1
  Top 0.406: J2.P$7 14.59,90.59 16,92 34,92 36,90 36,87 35,86 33.23,86 U$5.1
UNREG2
  Top 0.406: J3.P$7 14.59,60.59 16,62 34,62 36,60 36,57 35,56 33.23,56 U$9.1
UNREG3
  Top 0.406: J4.P$7 14.59,30.59 16,32 34,32 36,30 36,27 35,26 33.23,26 U$13.1
VSEL
  Top 0.152: R4.2 62.22,117.6 61.37,116.75 60.1,116.75 60.07,116.78 U$3.13 57.17,116.78 56.8,116.4 56.8,114.15 R6.1
VSEL1
  Top 0.152: R12.2 62.22,87.6 61.37,86.75 60.1,86.75 60.07,86.78 U$8.13 57.17,86.78 56.8,86.4 56.8,84.15 R14.1
VSEL2
  Top 0.152: R20.2 62.22,57.6 61.37,56.75 60.1,56.75 60.07,56.77 U$12.13 57.17,56.77 56.8,56.4 56.8,54.15 R22.1
VSEL3
  Top 0.152: R28.2 62.22,27.6 61.37,26.75 60.1,26.75 60.07,26.77 U$16.13 57.17,26.77 56.8,26.4 56.8,24.15 R30.1

## Text on the board
bPlace: THIS / SIDE / DOWN | THIS / SIDE / DOWN | THIS / SIDE / DOWN | THIS / SIDE / DOWN
tNames: U$3 | C8 | C6 | R7 | R8 | R4 | R1 | C5 | C4 | C9 | C7 | R6 | C10 | C11 | R5 | R2 | C2 | R3 | C1 | U$3 | C8 | C6 | R7 | R8 | R4 | R1 | C5 | C4 | C9 | C7 | R6 | C10 | C11 | R5 | R2 | C2 | R3 | C1 | U$3 | C8 | C6 | R7 | R8 | R4 | R1 | C5 | C4 | C9 | C7 | R6 | C10 | C11 | R5 | R2 | C2 | R3 | C1 | U$3 | C8 | C6 | R7 | R8 | R4 | R1 | C5 | C4 | C9 | C7 | R6 | C10 | C11 | R5 | R2 | C2 | R3 | C1